# Altium PCB PCB.PcbDoc (part 1 of 4)
Units mil, origin at the board's own origin, x right, y up, seen from the top; angles counter-clockwise.
Board outline 2958.79 x 990.23 mil, 2 copper layers (Component Side, Bottom Layer), stack 63.78 mil thick; 63 components, 40 nets, 198 pads, 73 vias.
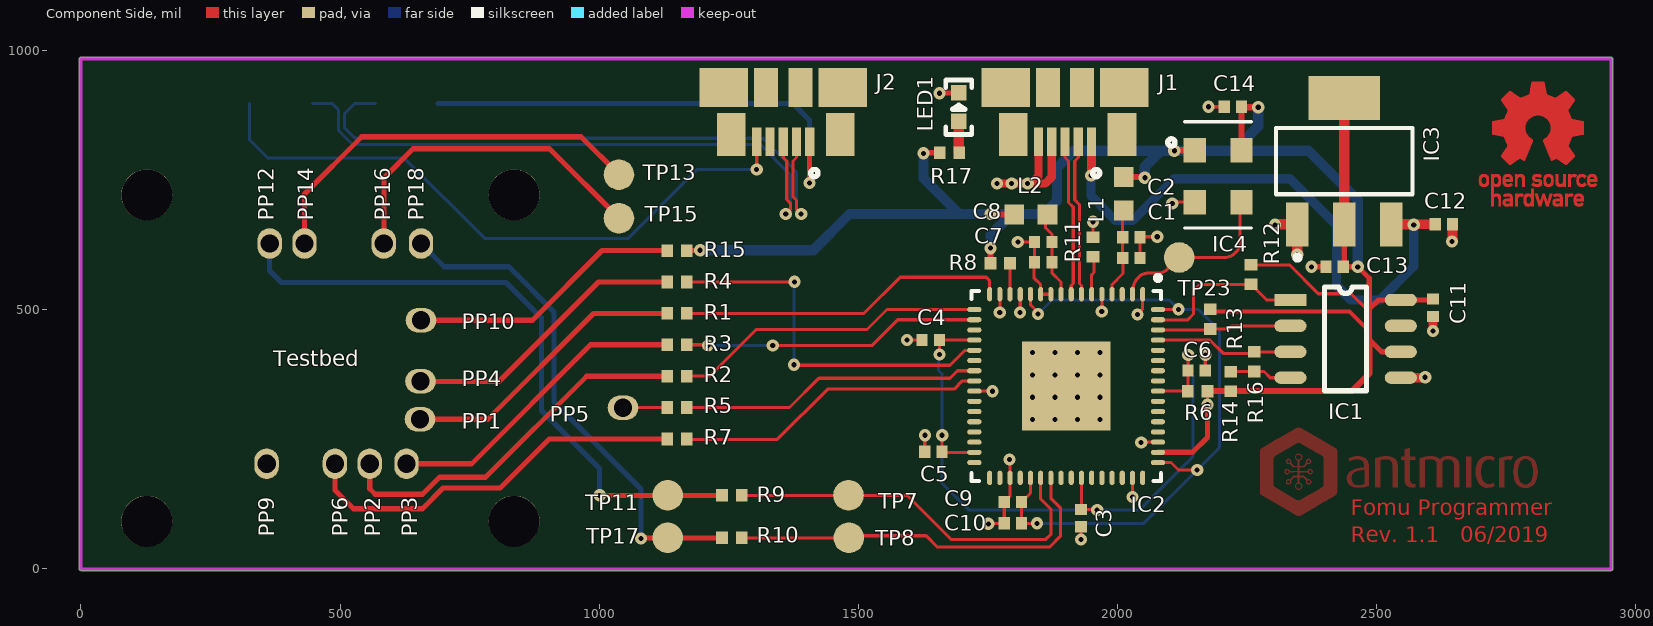
[diagram p0: Component Side view]
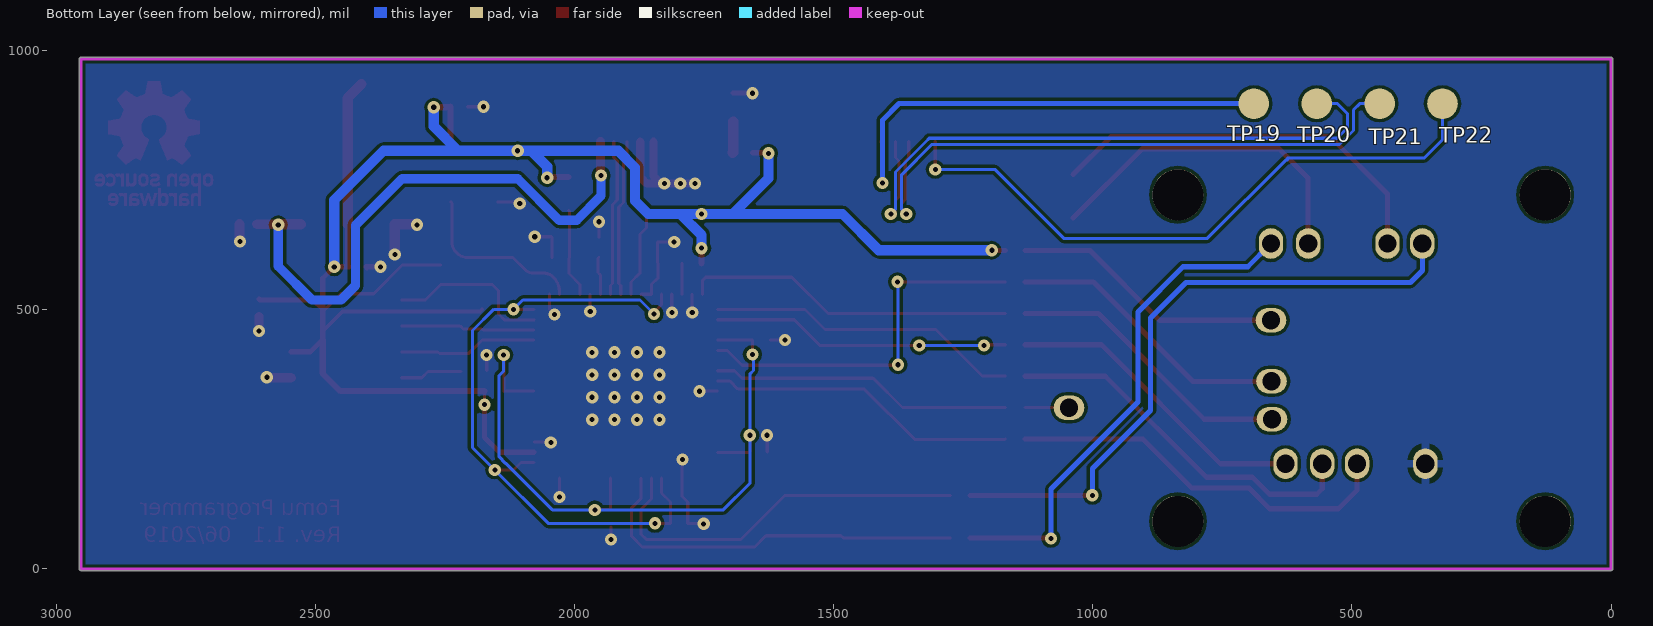
[diagram p1: Bottom Layer view, seen from below]
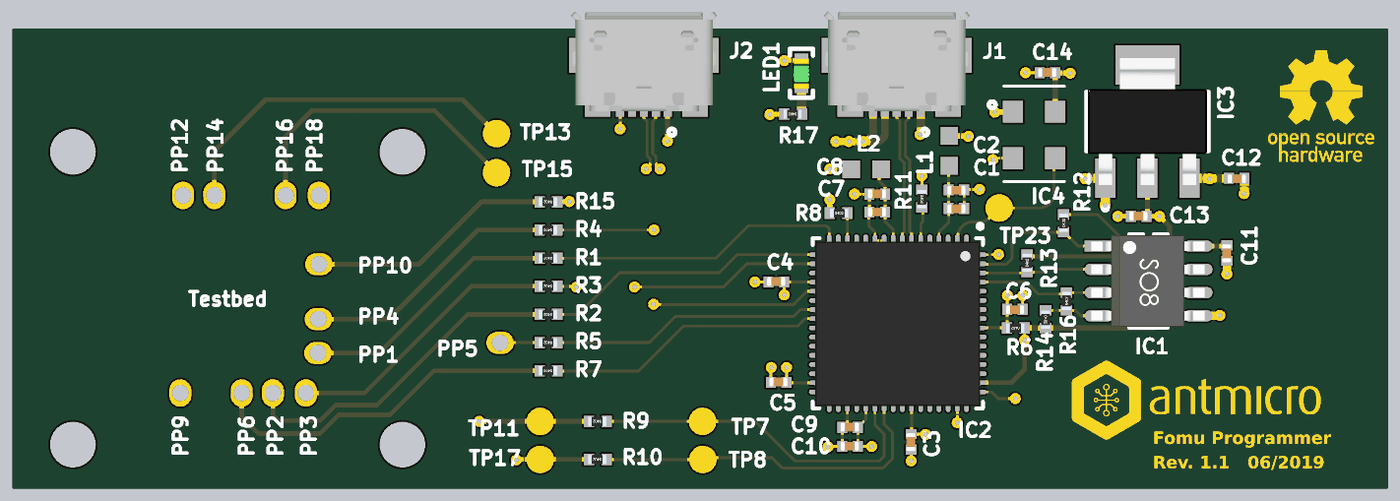
[diagram p5: 3D render of the assembled board from above, using the file's embedded part models]

## Layer stack, top to bottom
Top Solder: solder mask 0.4, Solder Resist, Dk 3.5
Component Side: signal copper 1.378
Dielectric 1: core 61.0236, FR-4, Dk 4.2
Bottom Layer: signal copper 1.378
Solder Side: solder mask 0.4, Solder Resist, Dk 3.5

## Board outline
-3.01,0 -3.01,25 cw(c0,25) -2.97,25.53 -2.97,984.25 cw(c0,984.25) 0,987.22 2952.76,987.22 cw(c2952.76,984.25) 2955.72,984.25 2955.72,0.53 cw(c2952.76,0) 2955.77,0 cw(c2952.76,0) 2952.76,-3.01 0,-3.01 cw(c0,0)

## Design rules (kind name [scope] priority, off if disabled: settings)
Clearance [All] p1: gap=6
DiffPairsRouting [All] p1: maxlimit=5 minlimit=6 mostfreqgap=6 toplayer_minwidth=6 toplayer_maxwidth=6 toplayer_prefwidth=6 bottomlayer_minwidth=6 bottomlayer_maxwidth=6 bottomlayer_prefwidth=6 maxuncoupledlength=500
HoleSize [All] p1: absolutevalues=TRUE maxlimit=150 minlimit=9.84 maxpercent=80.000 minpercent=20.000
MinimumAnnularRing [All] p1: minimumring=4.92
MinimumSolderMaskSliver [All] p1: minsoldermaskwidth=0
PlaneClearance [All] p1: clearance=10
PlaneConnect [All] p1: planeconnectstyle=Direct reliefexpansion=20 reliefentries=4 reliefconductorwidth=10 reliefairgap=10
PolygonConnect PolygonConnect_via [isVia] p1: connectstyle=Direct reliefconductorwidth=10 reliefentries=4 polygonreliefangle="90 Angle" airgapwidth=10
PolygonConnect [All] p2: connectstyle=Relief reliefconductorwidth=15.75 reliefentries=4 polygonreliefangle="90 Angle" airgapwidth=10
RoutingVias [All] p1: holewidth=9.84 width=23.62 viastyle="Through Hole" minholewidth=9.84 minwidth=23.62 maxholewidth=9.84 maxwidth=23.62
SilkToSilkClearance [All] p1: silktosilkclearance=8
SilkToSolderMaskClearance [IsPad] p1: minsilkscreentomaskgap=3 clearancetoexposedcopper=TRUE
SolderMaskExpansion ViaTenting [isVia] p1: expansion=-11.81
SolderMaskExpansion [All] p2: expansion=4
Width [All] p1: maxlimit=39.37 minlimit=0.04 preferedwidth=6 bottomlayer_minwidth=3.94 minimp=50.000000 maximp=50.000000 favimp=50.000000
22 further rules are at their usual default settings.

## Classes and differential pairs
component class Mechanics: COMP1 M1 M2 M3 M4 M5 M6 M7 M8 M9 M10 M11 M12 M13 M14 M15 M16
differential pair TOMU_USB_D: +TOMU_USB_D_P -TOMU_USB_D_N
differential pair USB_D: +USB_D_P -USB_D_N

## Components (designator, comment, footprint, x,y, rotation, side; value= is the part's Value field where it differs from the comment)
C1 "100n" 0402#1 2027,600 r180 top
C2 "4u7" 0402#1 2027,640 r180 top
C3 "100n" 0402#1 1930,98 r90 top
C4 "100n" 0402#1 1640,442 r0 top
C5 "100n" 0402#1 1645,226 r0 top
C6 "100n" 0402#1 2153,383 r180 top
C7 "100n" 0402#1 1857,591.84 r0 top
C8 "4u7" 0402#1 1857,630.84 r0 top
C9 "100n" 0402#1 1798.39,129.05 r0 top
C10 "100n" 0402#1 1798.39,88.05 r0 top
C11 "100n" 0402#1 2609,504 r90 top
C12 "4u7" 0402#1 2630,665 r180 top
C13 "4u7" 0402#1 2419.25,583 r0 top
C14 "100n" 0402#1 2223,892 r0 top
IC1 "93LC56C-I/SN-ND" SOIC-8 2334,519 r0 top
IC2 "FT2232HQ" FT2232HQ 1901.25,353 r270 top
IC3 "AP1117E33G-13" SOT223 2438,787 r0 top
IC4 "ASFLMB-12.000MHZ-LC-T" ASFLMB 2194.25,758 r270 top
J1 "Molex 47346-0001" CON-Molex-047346-0001 1899,874 r270 top
J2 "Molex 47346-0001" CON-Molex-047346-0001 1355.25,874 r270 top
L1 "BLM18AG601SN1D" 0603 2012,724 r270 top
L2 "BLM18AG601SN1D" 0603 1833,684 r0 top
LED1 "KPT-1608SGC" LED0603 1694,891 r90 top
PP1 "Value" TP-R-1.5-THT 654.25,289 r90 top
PP2 "Value" TP-R-1.5-THT 557.25,203 r0 top
PP3 "Value" TP-R-1.5-THT 628.25,203 r0 top
PP4 "Value" TP-R-1.5-THT 655.25,362 r90 top
PP5 "Value" TP-R-1.5-THT 1046,311 r270 top
PP6 "Value" TP-R-1.5-THT 490.25,203 r0 top
PP9 "Value" TP-R-1.5-THT 358.25,203 r0 top
PP10 "Value" TP-R-1.5-THT 656.25,480 r90 top
PP12 "Value" TP-R-1.5-THT 364.13,628.03 r180 top
PP14 "Value" TP-R-1.5-THT 431.45,628.03 r180 top
PP16 "Value" TP-R-1.5-THT 584.6,628.03 r180 top
PP18 "Value" TP-R-1.5-THT 656.25,628.03 r180 top
R1 "0R" 0402#2 1150,493.12 r180 top
R2 "0R" 0402#2 1150,372 r180 top
R3 "0R" 0402#2 1150,432.56 r180 top
R4 "0R" 0402#2 1150,553.68 r180 top
R5 "0R" 0402#2 1150,311.44 r180 top
R6 "0R" 0402#2 2155,343 r180 top
R7 "0R" 0402#2 1150,250.88 r180 top
R8 "2k2" 0402#2 1774,590 r0 top
R9 "0R" 0402#2 1256,142 r180 top
R10 "0R" 0402#2 1256,60 r180 top
R11 "12k" 0402#2 1953,621 r270 top
R12 "10k" 0402#2 2258,568 r90 top
R13 "10k" 0402#2 2179,482 r90 top
R14 "10k" 0402#2 2219,362 r270 top
R15 "0R" 0402#2 1150,614.24 r180 top
R16 "2k2" 0402#2 2264,400 r90 top
R17 "330R" 0402#2 1676,803 r180 top
TP7 "Testpad" TP-R-1.5 1481.25,142 r90 top
TP8 "Testpad" TP-R-1.5 1482,60 r90 top
TP11 "Testpad" TP-R-1.5 1132.25,142 r90 top
TP13 "Testpad" TP-R-1.5 1038.25,761 r90 top
TP15 "Testpad" TP-R-1.5 1038.25,677 r90 top
TP17 "Testpad" TP-R-1.5 1132.25,60 r90 top
TP19 "Testpad" TP-R-1.5 689.25,898 r90 bottom
TP20 "Testpad" TP-R-1.5 567.92,898 r90 bottom
TP21 "Testpad" TP-R-1.5 446.59,898 r90 bottom
TP22 "Testpad" TP-R-1.5 325.25,898 r90 bottom
TP23 "Testpad" TP-R-1.5 2119.25,601 r90 top

## Footprints (in the part's own frame and the unit in brackets; to place one, negate y for a bottom-side part, rotate by r counter-clockwise, add the part's x,y. Pads: shape width x height; smd on the part's side, far side on the other; paste and mask are expansions set on the pad)
0402#1 [mm]
  rect 0.55x0.6 smd: 1(-0.425,0) 2(0.425,0)
  body extent -0.51,-0.25 0.5,0.27, height 0.49
0402#2 [mm]
  rect 0.57x0.62 smd: 1(-0.48,0) 2(0.48,0)
  body extent -0.47,-0.25 0.53,0.25, height 0.35
0603 [mm] "Chip Inductor Ferrite Bead 0603"
  rect 0.97x0.96 smd: 1(-0.815,0) 2(0.815,0)
  body extent -0.87,-0.48 0.87,0.47, height 0.6
ASFLMB [mm]
  rect 1.2x1.1 smd: 1(-1.27,-1.15) 2(1.27,-1.15) 3(1.27,1.15) 4(-1.27,1.15)
  silkscreen extent -2.67,-2.46 2.54,1.65, body extent -2.54,-1.65 2.54,1.65, height 0.85
CON-Molex-047346-0001 [mm]
  rect 1.38x0.45 smd: 1(1.263,1.3) 2(1.263,0.65) 3(1.263,0) 4(1.263,-0.65) 5(1.263,-1.3)
  rect 1.9x2.37 smd: S(-1.397,2.91) S(-1.397,-2.91)
  rect 1.9x1.175 smd: S(-1.397,0.837) S(-1.397,-0.837)
  rect 2.1x1.4 smd: S(0.903,2.794) S(0.903,-2.54)
  silkscreen extent 2.61,1.35 2.97,1.7, body extent -3.8,-3.99 1.63,3.99, height 2.71
FT2232HQ [mm] "QFN, 64-Leads, Body 9,00x9,00mm, Pitch 0,50mm, Thermal Pad 4,35x4,35mm, IPC Medium Density"
  oval 0.7x0.25 smd: 2(-4.5,3.25) 3(-4.5,2.75) 4(-4.5,2.25) 6(-4.5,1.25) 7(-4.5,0.75) 8(-4.5,0.25) 9(-4.5,-0.25) 10(-4.5,-0.75) 13(-4.5,-2.25) 14(-4.5,-2.75) 16(-4.5,-3.75) 33(4.5,-3.75) 34(4.5,-3.25) 36(4.5,-2.25) 38(4.5,-1.25) 39(4.5,-0.75) 40(4.5,-0.25) 41(4.5,0.25) 43(4.5,1.25) 44(4.5,1.75) 45(4.5,2.25) 46(4.5,2.75) 48(4.5,3.75) GND(-4.5,3.75) GND(-4.5,-1.25) GND(-4.5,1.75) GND(-4.5,-3.25) GND(4.5,3.25) GND(4.5,-2.75) VCCIO(4.5,0.75) VCORE(-4.5,-1.75) VCORE(4.5,-1.75)
  oval 0.25x0.7 smd: 17(-3.75,-4.5) 18(-3.25,-4.5) 19(-2.75,-4.5) 21(-1.75,-4.5) 22(-1.25,-4.5) 23(-0.75,-4.5) 24(-0.25,-4.5) 26(0.75,-4.5) 27(1.25,-4.5) 28(1.75,-4.5) 29(2.25,-4.5) 30(2.75,-4.5) 32(3.75,-4.5) 49(3.75,4.5) 50(3.25,4.5) 52(2.25,4.5) 53(1.75,4.5) 54(1.25,4.5) 55(0.75,4.5) 57(-0.25,4.5) 58(-0.75,4.5) 59(-1.25,4.5) 60(-1.75,4.5) 61(-2.25,4.5) 62(-2.75,4.5) 63(-3.25,4.5) GND(0.25,-4.5) GND(2.75,4.5) VCCIO(-2.25,-4.5) VCCIO(0.25,4.5) VCCIO(3.25,-4.5) VCORE(-3.75,4.5)
  rect 4.35x4.35 smd: GND(0,0)
  silkscreen extent -5.42,-4.65 4.65,4.65, body extent -4.49,-4.53 4.55,4.51, height 0.9
LED0603 [mil]
  rect 30x30 smd: A(-27.5,0) K(27.5,0)
  silkscreen extent -52,-25 52,25, body extent -33,-16 31,16, height 43
SOIC-8 [mil]
  rect 62x24 smd: 1(0,0)
  oval 62x24 smd: 2(0,-50) 3(0,-100) 4(0,-150) 5(213,-150) 6(213,-100) 7(213,-50) 8(213,0)
  silkscreen extent 66,-175 147,25, body extent -17,-173 227,23, height 69
SOT223 [mm] "SOT-223/SC-73; 4 Leads; Body 6.7 x 7.3 mm, inc. leads (LxW max)"
  rect 1.1x2.15 smd: 1(-2.3,-3.1) 2(0,-3.1) 3(2.3,-3.1)
  rect 3.5x2.15 smd: 4(0,3.1)
  silkscreen extent -3.35,-4.85 3.35,1.63, body extent -3.25,-3.48 3.25,3.48, height 1.61
TP-R-1.5 [mm]
  round 1.5 smd paste-0.75: 1(0,0)
TP-R-1.5-THT [mm]
  oval 1.2x1.5 hole 0.9 paste-0.75: 1(0,0)

## Part data
C1 C2 C3 C4 C5 C6 C7 C8 C9 C10 C11 C12 C13 C14: "MLCC SMT Capacitor 100nF 0402"
IC1: "EEPROM SERIAL 1K, SMD, 93C46, SOIC8"
IC2: library part FT2232HL, "Dual USB-UART/FIFO"
IC3: "IC, LDO, REG, 3.3V, SOT223"
IC4: "MEMS Oscillator, Ultra-miniature, 12 MHz, SMD, 5mm x 3.2mm, 50 ppm, 3.3 V"
J1 J2: "USB - micro B Receptacle Connector 5 Position Surface Mount, Right Angle, Horizontal"
L1 L2: "Ferrite Bead, 600 ohm, 0603 [1608 Metric], BLM18A Series, 500 mA, 0.38 ohm, ? 25%"
LED1: "LED Green 0603 case"
PP1 PP2 PP3 PP4 PP5 PP6 PP9 PP10 PP12 PP14 PP16 PP18: "Testpad, round, 1.8mm"
R1 R2 R3 R4 R5 R6 R7 R8 R9 R10 R11 R12 R13 R14 R15 R16 R17: "SMT Resistor 0402"
TP7 TP8 TP11 TP13 TP15 TP17 TP19 TP20 TP21 TP22 TP23: "Testpad, round, 1.5mm"

## Free pads (board coordinates)
  round 98.43 hole 98.43 unplated: M(127.25,92) M(127.25,721.92) M(835.91,92) M(835.91,721.92)

## Via types
v1: diameter 23.62, hole 9.84, Component Side to Bottom Layer, 73 vias

## Nets (pads, with @x,y where several pads share a name; then routed paths per layer and width w, separated by ;. In a path a pad name is that pad's centre, name@x,y a point inside that pad or via, vN(x,y) a via of type N, cw(c..) or ccw(c..) an arc to the next point about the centre after c; other vN are vias at no path point)
1V8_FT: C9.2 C10.2 IC2.49 IC2.VCORE | length 1314.4
  Component Side w6: IC2.VCORE@1832.36,175.83 1832.36,146.29 C9.2@1815.12,129.05 C10.2@1815.12,88.05 1844.95,88.05 v1(1845,88) ; IC2.VCORE@1832.36,530.17 1832.36,509.64 1847,495 v1(1847,492) ; IC2.49@2078.42,205.36 2103.64,205.36 2118,191 v1(2154,191) ; IC2.VCORE@2078.42,500.64 2117.64,500.64 v1(2118,501)
  Bottom Layer w6: v1(1845,88) 2051,88 v1(2154,191) 2197,234 2197,460 2156,501 v1(2118,501) 2100,519 1874,519 v1(1847,492)
3V3: C11.2 C13.2 C14.2 IC1.6 IC1.8 IC2.50 IC3.2 IC3.4 IC4.1 IC4.4 L1.1 L2.1 R6.1 R8.1 R12.2 R13.2 R14.2 R15.1 R17.2 | length 4193.8
  Component Side w6: v1@2173.9,317.1 R6.1@2173.9,343 ; R12.2@2258,586.9 2332.1,586.9 2388,531 2451,531 2481,501 2486,501
  Component Side w7.87: R13.2@2179,500.9 2182.83,497.06 2447.94,497.06 2486,459
  Component Side w10: R15.1@1168.9,614.24 1194.24,614.24 v1(1195,615) ; v1(1626,802) 1627,803 R17.2@1657.1,803 ; IC2.50@2078.42,225.05 2145.05,225.05 2173.9,253.9 v1@2173.9,317.1 ; IC3.2@2438,664.95 2438,585.01 C13.2@2435.99,583 v1(2464,583) 2486,561 2486,501 ; 2486,443 2486,459 2486,501 ; 2488,441 2510,419 IC1.6@2547,419 ; C11.2@2609,520.73 2607.27,519 IC1.8@2547,519 2504,519 2486,501
  Component Side w11.81: v1(1755,619) 1755.1,618.9 R8.1@1755.1,590 ; v1@1758.64,684 L2.1@1798.55,684 ; L1.1@2012,756.09 2051.91,756.09 v1(2053,755) ; v1(2110,807) 2111,808 IC4.1@2148.98,808 ; R6.1@2173.9,343 2174,343.1 R14.2@2219,343.1 2452.1,343.1 2486,377 2486,443 ; IC4.4@2239.53,808 2239.53,891.8 C14.2@2239.73,892 2240.73,891 v1(2272,891)
  Component Side w19.68: IC3.4@2411.05,936 IC3.4@2438,909.05 IC3.2@2438,664.95
  Bottom Layer w19.68: v1(1195,615) 1413,615 1483.09,685.09 v1(1755,685.09) 1796,685.09 ; v1(1626,802) 1626,754 1694.91,685.09 ; v1(1755,619) 1755,644.09 1796,685.09 ; v1(2053,755) 2053,776 2084,807 ; v1(2272,891) 2272,854 2225,807 ; v1(2464,583) 2464,712 2369,807 2225,807 ; 1796,685.09 1858.17,685.09 1883.5,710.41 1883.5,774.5 1916,807 2084,807 ; 2084,807 v1(2110,807) 2225,807
  other v1: 2174,317
5V0: C12.2 IC3.3 J1.1 | length 1135.4
  Component Side w18: v1@1950.18,759 J1.1@1950.18,824.28 ; v1@2572,665 C12.2@2613.27,665
  Component Side w20: IC3.3@2528.55,664.95 v1@2571.05,664.95
  Bottom Layer w18: v1(1949,759) 1949,720 1996,673 2030,673 2110,753 2333,753 2423,663 2423,547 2451,519 2507,519 2572,584 v1(2572,664)
CLK_12MHZ: IC2.2 IC4.3 TP23.1 | length 340.6
  Component Side w6: IC2.2@2029.21,530.17 2029.21,534.53 cw(c2069.47,534.53) 2041,563 cw(c2060.31,543.69) 2060.31,571 2079,571 ccw(c2079,595.75) 2096.5,578.25 TP23.1@2119.25,601 2206,601 ccw(c2206,632) 2237,632 2237,705.47 cw(c2239.53,705.47) IC4.3@2239.53,708
EE_CLK: IC1.2 IC2.62 R13.1 | length 258.8
  Component Side w6: IC2.62@2078.42,461.27 2177.17,461.27 R13.1@2179,463.1 2215.1,463.1 2221,469 IC1.2@2334,469
EE_CS: IC1.1 IC2.63 R12.1 | length 323.3
  Component Side w6: IC2.63@2078.42,480.95 2079.18,480.19 2135.19,480.19 2147,492 2147,537 2159,549 2257.9,549 R12.1@2258,549.1 2288.1,519 IC1.1@2334,519
EE_DATA: IC1.3 IC2.61 R16.2 | length 263.3
  Component Side w6: IC2.61@2078.42,441.58 2178.68,441.58 2204.26,416 R16.2@2261.1,416 ; R16.2@2264,418.9 2333.9,418.9 IC1.3@2334,419
GND: C1.1 C2.1 C3.1 C4.1 C5.1 C6.1 C7.1 C8.1 C9.1 C10.1 C11.1 C12.1 C13.1 C14.1 IC1.5 IC2.10 IC2.13 IC2.GND IC3.1 IC4.2 J1.4 J1.5 LED1.K PP9.1 R11.1 | length 1406.7
  Component Side w6: v1(1594,442) C4.1@1623.27,442 ; C5.1@1628.27,226 v1@1628.27,257.27 ; v1@1628.27,266.08 v1@1629,266.81 ; IC2.GND@1724.09,343.16 1758.84,343.16 v1(1759,343) ; v1(1751,87) 1752.05,88.05 C10.1@1781.65,88.05 C9.1@1781.65,129.05 1792.99,140.38 IC2.GND@1792.99,175.83 1792.99,210.01 v1(1792,211) ; v1@1773,486.19 v1@1773.3,486.49 ; v1@1773.3,495.3 IC2.GND@1773.3,530.17 ; v1(1808,631) 1808.16,630.84 C8.1@1840.27,630.84 C7.1@1840.27,591.84 1839,590.57 1839,562 1852.04,548.96 IC2.GND@1852.04,530.17 IC2.10@1871.73,530.17 ; v1@1812,486.19 v1@1812.67,486.86 ; v1@1812.67,495.67 IC2.13@1812.67,530.17 ; v1(1930,57) C3.1@1930,81.27 ; R11.1@1953,639.9 v1(1953,670) ; v1(1970,497) 1970.15,497.15 IC2.GND@1970.15,530.17 ; v1(2029,139) 2029.21,139.21 IC2.GND@2029.21,175.83 ; v1(2039,491) 2038,491 2048.89,501.89 IC2.GND@2048.89,530.17 ; C1.1@2043.73,600 C2.1@2043.73,640 2044.73,641 v1(2077,641) ; v1(2046,244) 2046.73,244.73 IC2.GND@2078.42,244.73 ; v1(2106,705) 2109,708 IC4.2@2148.98,708 ; C6.1@2169.73,383 2169.73,410.73 v1@2170,411 ; v1(2176,892) C14.1@2206.27,892
  Component Side w10: v1(1657,918) 1657.5,918.5 LED1.K@1694,918.5 ; v1(2374.51,583) C13.1@2402.52,583 C13.1@2400.51,580.99
  Component Side w16: v1(1768,744) v1@1834,744 ; J1.5@1847.82,824.28 1847.82,757.82 v1@1834,744 ; J1.4@1873.41,824.28 1873.41,756.41 1861,744 v1@1834,744
  Component Side w18: IC1.5@2547,369 2593,369 v1(2594,370) ; v1(2609,459) C11.1@2609,487.27
  Component Side w20: v1(2304,664) 2304.95,664.95 IC3.1@2347.45,664.95 2347.45,607.45 v1(2347,607) ; v1(2646,632) 2646.73,632.73 C12.1@2646.73,665
  other v1: 1629,258 1836.29,288.04 1879.6,288.04 1922.91,288.04 1966.21,288.04 1836.29,331.35 1879.6,331.35 1922.91,331.35 1966.21,331.35 1836.29,374.65 1879.6,374.65 1922.91,374.65 1966.21,374.65 2170,413 1836.29,417.96 1879.6,417.96 1922.91,417.96 1966.21,417.96 1773,495 1812,495 1796,744 1827,744
ICE_CDONE: PP5.1 R5.2 | length 85.3
  Component Side w6: PP5.1@1046,311 1046.44,311.44 R5.2@1131.1,311.44
ICE_CREST: PP6.1 R7.2 | length 762.8
  Component Side w10: PP6.1@490.25,203 490.25,151.75 526,116 659,116 699,156 809,156 903.88,250.88 R7.2@1131.1,250.88
ICE_MISO: PP3.1 R3.2 | length 597.9
  Component Side w10: PP3.1@628.25,203 754,203 983.56,432.56 R3.2@1131.1,432.56
ICE_MOSI: PP2.1 R2.2 | length 721
  Component Side w10: PP2.1@557.25,203 557.25,154.75 568,144 659,144 692,177 781,177 976,372 R2.2@1131.1,372
ICE_SCK: PP1.1 R1.2 | length 561.4
  Component Side w10: PP1.1@654.25,289 785,289 989.12,493.12 R1.2@1131.1,493.12
ICE_SS: PP4.1 R4.2 | length 555.2
  Component Side w10: PP4.1@655.25,362 807,362 998.68,553.68 R4.2@1131.1,553.68
MISO: IC2.18 R3.1 | length 576.5
  Component Side w6: R3.1@1168.9,432.56 1208.44,432.56 v1(1210,431) ; v1(1335,431) 1526,431 1575.95,480.95 IC2.18@1724.09,480.95
  Bottom Layer w6: v1(1210,431) v1(1335,431)
MOSI: IC2.17 R2.1 | length 608.5
  Component Side w6: R2.1@1168.9,372 1213,372 1303,462 1517,462 1555.64,500.64 IC2.17@1724.09,500.64
NetIC1_4: IC1.4 R14.1 R16.1 | length 120.1
  Component Side w6: R14.1@2219,380.9 2219.2,381.1 R16.1@2264,381.1 2282.9,381.1 2295,369 IC1.4@2334,369
NetIC2_6: IC2.6 R11.2 | length 74.6
  Component Side w6: IC2.6@1950.47,530.17 1950.47,567.47 1955,572 1955,600.1 R11.2@1953,602.1
NetIC2_14: IC2.14 R8.2 | length 59.9
  Component Side w6: R8.2@1792.9,590 1792.99,589.91 IC2.14@1792.99,530.17
NetIC2_23: IC2.23 R5.1 | length 584.6
  Component Side w6: R5.1@1168.9,311.44 1367.44,311.44 1424,368 1677,368 1691.53,382.53 IC2.23@1724.09,382.53
NetIC2_24: IC2.24 R7.1 | length 602.3
  Component Side w6: R7.1@1168.9,250.88 1169.78,250 1344,250 1441,347 1685,347 1700.84,362.84 IC2.24@1724.09,362.84
NetJ2_1: J2.1 TP19.1 | length 930.5
  Component Side w10: v1(1406,745) 1406,823.84 J2.1@1406.43,824.28
  Bottom Layer w10: TP19.1@689.25,898 1374,898 1406,866 v1(1406,745)
NetJ2_5: J2.5 TP22.1 | length 1234.2
  Component Side w6: v1(1304,771) 1304.07,771.07 J2.5@1304.07,824.28
  Bottom Layer w6: TP22.1@325.25,898 325.25,828 360.25,793 624.26,793 ; 624.26,788.97 628.03,788.97 779,638 1056.25,638 1189.25,771 v1(1304,771)
NetLED1_A: LED1.A R17.1 | length 60.9
  Component Side w20: LED1.A@1694,863.5 1694,803.9 R17.1@1694.9,803
NetPP10_1: PP10.1 R15.2 | length 530.5
  Component Side w10: PP10.1@656.25,480 871.22,480 1005.46,614.24 R15.2@1131.1,614.24
PIN1: PP12.1 R9.2 TP11.1 | length 1240.4
  Component Side w10: v1(1001,142) 1080,142 1081,141 1082,142 TP11.1@1132.25,142 R9.2@1237.1,142
  Bottom Layer w10: PP12.1@364.13,628.03 364.13,575.87 387,553 820,553 889,484 889,306 1001,194 v1(1001,142)
PIN2: PP14.1 TP13.1 | length 778.3
  Component Side w10: PP14.1@431.45,628.03 431.45,723.55 541.9,834 965.25,834 TP13.1@1038.25,761
PIN3: PP16.1 TP15.1 | length 659.1
  Component Side w10: PP16.1@584.6,628.03 584.6,754.6 641,811 904.25,811 TP15.1@1038.25,677
PIN4: PP18.1 R10.2 TP17.1 | length 974.5
  Component Side w10: v1(1081,59) 1082,60 TP17.1@1132.25,60 R10.2@1237.1,60
  Bottom Layer w10: PP18.1@656.25,628.03 701.28,583 826,583 913,496 913,322 1081,154 v1(1081,59)
SCK: IC2.16 R1.1 | length 642.6
  Component Side w6: R1.1@1168.9,493.12 1511.12,493.12 1581,563 1747,563 1753.62,556.38 IC2.16@1753.62,530.17
SS: IC2.21 R4.1 | length 729
  Component Side w6: R4.1@1168.9,553.68 1376.68,553.68 v1(1377,554) ; v1(1376,394) 1376.81,393.19 1677.19,393.19 1705.9,421.9 IC2.21@1724.09,421.9
  Bottom Layer w6: v1(1376,394) 1376,553 v1(1377,554)
TOMU_USB_D_N: J2.2 TP20.1 | length 1231.8
  Component Side w6: J2.2@1380.84,824.28 1380.84,794 1374.05,787.2 1374.05,717.95 1381,711 1381,693.81 1381.48,693.33 v1@1381.48,685
  Bottom Layer w6: TP20.1@567.92,898 528,898 509,879 509,851 528.97,831.03 1315.94,831.03 1322.97,824 1381,765.97 1381,693.81 v1(1389.81,685)
TOMU_USB_D_P: J2.3 TP21.1 | length 1230.8
  Component Side w6: J2.3@1355.25,824.28 1355.25,794 1362.05,787.2 1362.05,712.98 1369,706.03 1369,693.81 v1(1360.19,685)
  Bottom Layer w6: TP21.1@446.59,898 485,898 497,886 497,846.03 524,819.03 1310.97,819.03 1369,761 1369,693.81 v1(1360.19,685)
UART_RX: IC2.38 R9.1 TP7.1 | length 753.6
  Component Side w6: R9.1@1274.9,142 TP7.1@1481.25,142 1594,142 1679,57 1862,57 1872,67 1872,115 1852.04,134.96 IC2.38@1852.04,175.83
UART_TX: IC2.39 R10.1 TP8.1 | length 755
  Component Side w6: R10.1@1274.9,60 TP8.1@1482,60 1486,64 1631,64 1653,42 1869,42 1890,63 1890,118 1871.73,136.27 IC2.39@1871.73,175.83
USB_D_N: IC2.7 J1.2 | length 302.3
  Component Side w6: J1.2@1924.59,824.28 1924.59,794 1917.8,787.2 1917.8,712.18 1926.94,703.03 1926.94,550.84 1930.78,547 IC2.7@1930.78,530.17
USB_D_P: IC2.8 J1.3 | length 302.3
  Component Side w6: J1.3@1899,824.28 1899,794 1905.8,787.2 1905.8,707.2 1914.94,698.06 1914.94,550.84 1911.1,547 IC2.8@1911.1,530.17
VCCIO: C3.2 C4.2 C5.2 C6.2 IC2.VCCIO R6.2 | length 1410.7
  Component Side w6: v1(1657,414) 1656.73,414.27 C4.2@1656.73,442 1657.15,441.58 IC2.VCCIO@1724.09,441.58 ; v1@1662,257 1662,226.27 C5.2@1661.73,226 1662.69,225.05 IC2.VCCIO@1724.09,225.05 ; IC2.VCCIO@1930.78,175.83 1930.78,115.51 C3.2@1930,114.73 1960.27,114.73 v1(1961,114) ; IC2.VCCIO@2078.42,343.16 2135.94,343.16 R6.2@2136.1,343 2136.27,343.17 C6.2@2136.27,383 2136.27,412.27 v1(2137,413)
  Bottom Layer w6: v1(1657,414) 1655,412 1655,383 1662,376 v1(1662,258) 1662,165 1713,114 v1(1961,114) 2043,114 2133.19,204.19 2133.62,204.19 2145.81,216.38 2145.81,373.16 2137,381.97 v1(2137,413)
VPHY: C1.2 C2.2 IC2.4 L1.2 | length 171.5
  Component Side w6: IC2.4@1989.84,530.17 1989.84,548.84 2011,570 2011,599.27 C1.2@2010.27,600 C2.2@2010.27,640 2010.27,690.18 L1.2@2012,691.91
VPLL: C7.2 C8.2 IC2.9 L2.2 | length 170.3
  Component Side w6: L2.2@1861,687.91 1861,659 1873.73,646.27 C8.2@1873.73,630.84 C7.2@1873.73,591.84 1873.73,571.27 1891.41,553.59 IC2.9@1891.41,530.17
pads on no net: IC1.7 IC2.3 IC2.19 IC2.22 IC2.26 IC2.27 IC2.28 IC2.29 IC2.30 IC2.32 IC2.33 IC2.34 IC2.36 IC2.40 IC2.41 IC2.43 IC2.44 IC2.45 IC2.46 IC2.48 IC2.52 IC2.53 IC2.54 IC2.55 IC2.57 IC2.58 IC2.59 IC2.60 J1.S J2.4 J2.S
copper on no net: | length 65497.4